# EAGLE board rc-light-controller-ws2812-12f1840-panelized (EAGLE 6.5.0)
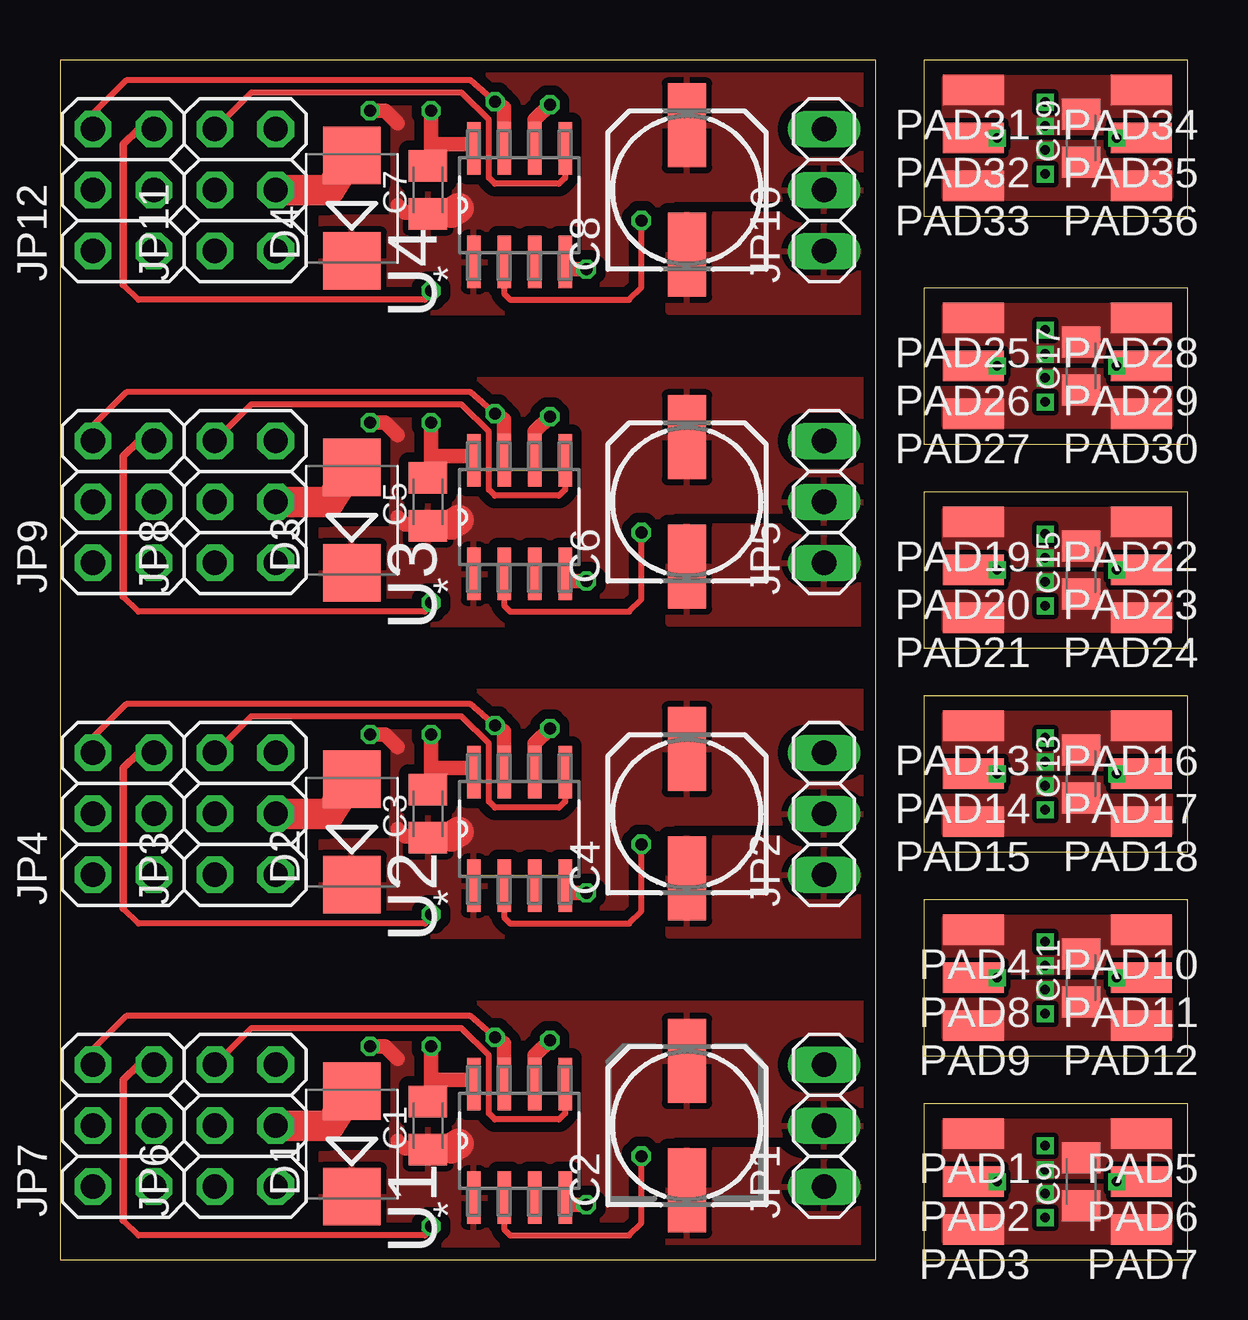
[diagram p0: board, top side]
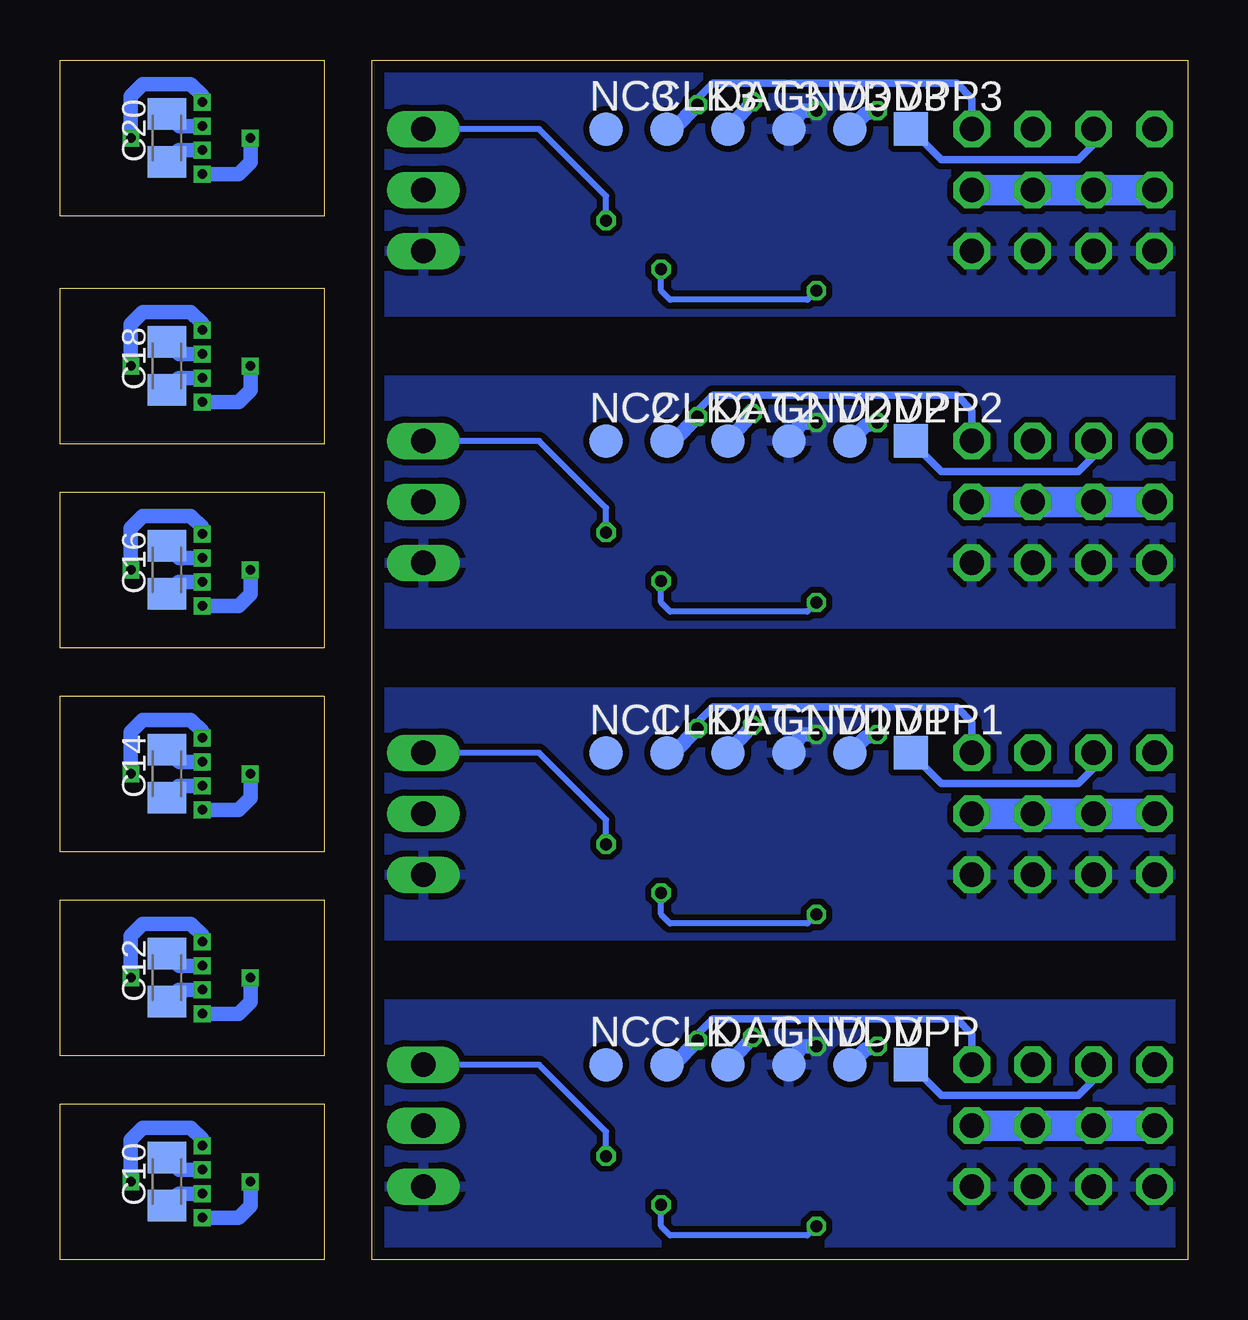
[diagram p1: board, bottom side, seen from below]

Size 47 x 50 mm. Coordinates in mm from the lower left corner, seen from the top.
Outline: 0,0 34,0 34,50 0,50 0,0
Outline: 36,0 47,0 47,6.5 36,6.5 36,0
Outline: 36,8.5 47,8.5 47,15 36,15 36,8.5
Outline: 36,17 47,17 47,23.5 36,23.5 36,17
Outline: 36,25.5 47,25.5 47,32 36,32 36,25.5
Outline: 36,34 47,34 47,40.5 36,40.5 36,34
Outline: 36,43.5 47,43.5 47,50 36,50 36,43.5
Copper layers (1*16): Top 0.035mm / dielectric 1.5mm / Bottom 0.035mm
Design rules "smart-prototyping": minimum track width 7mil, minimum drill 12mil, track to track 7mil, track to pad 7mil, pad to pad 7mil, via to via 7mil, smd to smd 0mil, copper to edge 20mil, drill to drill 10mil, minimum pad ring 10mil, minimum via ring 6mil, stop-mask expansion 2mil, vias tented up to drill 25mil, thermal gap 10mil

## Footprints (pad centres in the part's own frame; a part is rotated, then mirrored left to right if it is on the bottom)
C0805K = smd 1.3 x 1.6: 1 -1,0; 2 1,0
153CLV-0605 = smd 3.5 x 1.6: + 2.7,0; - -2.7,0
TP14R = smd 1.4 x 1.4: TP 0,0
SMB = smd 2.4 x 2.4: A 2.2,0; C -2.2,0
1X03 = drill 1.016 long: 1 -2.54,0; 2 0,0; 3 2.54,0
2X03 = drill 1.016 octagon: 1 -2.54,-1.27; 2 -2.54,1.27; 3 0,-1.27; 4 0,1.27; 5 2.54,-1.27; 6 2.54,1.27
SMD1,27-2,54 = smd 1.27 x 2.54: 1 0,0
SOIC127P600X175-8N = smd 2.184 x 0.559: 1 -2.362,1.905; 2 -2.362,0.635; 3 -2.362,-0.635; 4 -2.362,-1.905; 5 2.362,-1.905; 6 2.362,-0.635; 7 2.362,0.635; 8 2.362,1.905
TP14SQ = smd 1.4 x 1.4: TP 0,0

## Placement (x,y rotation side)
C1  100n  [C0805K]  15.34,5.58 90 top
C2  100u 16V  [153CLV-0605]  26.14,5.58 90 top
C3  100n  [C0805K]  15.34,18.58 90 top
C4  100u 16V  [153CLV-0605]  26.14,18.58 90 top
C5  100n  [C0805K]  15.34,31.58 90 top
C6  100u 16V  [153CLV-0605]  26.14,31.58 90 top
C7  100n  [C0805K]  15.34,44.58 90 top
C8  100u 16V  [153CLV-0605]  26.14,44.58 90 top
C9  100nF  [C0805K]  42.57,3.24 90 top
C10  100nF  [C0805K]  42.54,3.25 90 bottom
C11  100nF  [C0805K]  42.57,11.74 90 top
C12  100nF  [C0805K]  42.54,11.75 90 bottom
C13  100nF  [C0805K]  42.57,20.24 90 top
C14  100nF  [C0805K]  42.54,20.25 90 bottom
C15  100nF  [C0805K]  42.57,28.74 90 top
C16  100nF  [C0805K]  42.54,28.75 90 bottom
C17  100nF  [C0805K]  42.57,37.24 90 top
C18  100nF  [C0805K]  42.54,37.25 90 bottom
C19  100nF  [C0805K]  42.57,46.74 90 top
C20  100nF  [C0805K]  42.54,46.75 90 bottom
CLK  PTR1TP14R  [TP14R]  21.69,8.12 0 bottom
CLK1  PTR1TP14R  [TP14R]  21.69,21.12 0 bottom
CLK2  PTR1TP14R  [TP14R]  21.69,34.12 0 bottom
CLK3  PTR1TP14R  [TP14R]  21.69,47.12 0 bottom
D1  ES2D  [SMB]  12.16,4.82 90 top
D2  ES2D  [SMB]  12.16,17.82 90 top
D3  ES2D  [SMB]  12.16,30.82 90 top
D4  ES2D  [SMB]  12.16,43.82 90 top
DAT  PTR1TP14R  [TP14R]  19.15,8.12 0 bottom
DAT1  PTR1TP14R  [TP14R]  19.15,21.12 0 bottom
DAT2  PTR1TP14R  [TP14R]  19.15,34.12 0 bottom
DAT3  PTR1TP14R  [TP14R]  19.15,47.12 0 bottom
GND  PTR1TP14R  [TP14R]  16.61,8.12 0 bottom
GND1  PTR1TP14R  [TP14R]  16.61,21.12 0 bottom
GND2  PTR1TP14R  [TP14R]  16.61,34.12 0 bottom
GND3  PTR1TP14R  [TP14R]  16.61,47.12 0 bottom
JP1  LED OUT  [1X03]  31.85,5.58 90 top
JP2  LED OUT  [1X03]  31.85,18.58 90 top
JP3  [2X03]  7.72,18.58 90 top
JP4  [2X03]  2.64,18.58 90 top
JP5  LED OUT  [1X03]  31.85,31.58 90 top
JP6  [2X03]  7.72,5.58 90 top
JP7  [2X03]  2.64,5.58 90 top
JP8  [2X03]  7.72,31.58 90 top
JP9  [2X03]  2.64,31.58 90 top
JP10  LED OUT  [1X03]  31.85,44.58 90 top
JP11  [2X03]  7.72,44.58 90 top
JP12  [2X03]  2.64,44.58 90 top
NC  PTR1TP14R  [TP14R]  24.23,8.12 0 bottom
NC1  PTR1TP14R  [TP14R]  24.23,21.12 0 bottom
NC2  PTR1TP14R  [TP14R]  24.23,34.12 0 bottom
NC3  PTR1TP14R  [TP14R]  24.23,47.12 0 bottom
PAD1  [SMD1,27-2,54]  38.07,5.24 90 top
PAD2  WIREPADSMD1,27-254  [SMD1,27-2,54]  38.07,3.24 90 top
PAD3  WIREPADSMD1,27-254  [SMD1,27-2,54]  38.07,1.24 90 top
PAD4  [SMD1,27-2,54]  38.07,13.74 90 top
PAD5  WIREPADSMD1,27-254  [SMD1,27-2,54]  45.07,5.24 90 top
PAD6  WIREPADSMD1,27-254  [SMD1,27-2,54]  45.07,3.24 90 top
PAD7  WIREPADSMD1,27-254  [SMD1,27-2,54]  45.07,1.24 90 top
PAD8  WIREPADSMD1,27-254  [SMD1,27-2,54]  38.07,11.74 90 top
PAD9  WIREPADSMD1,27-254  [SMD1,27-2,54]  38.07,9.74 90 top
PAD10  WIREPADSMD1,27-254  [SMD1,27-2,54]  45.07,13.74 90 top
PAD11  WIREPADSMD1,27-254  [SMD1,27-2,54]  45.07,11.74 90 top
PAD12  WIREPADSMD1,27-254  [SMD1,27-2,54]  45.07,9.74 90 top
PAD13  [SMD1,27-2,54]  38.07,22.24 90 top
PAD14  WIREPADSMD1,27-254  [SMD1,27-2,54]  38.07,20.24 90 top
PAD15  WIREPADSMD1,27-254  [SMD1,27-2,54]  38.07,18.24 90 top
PAD16  WIREPADSMD1,27-254  [SMD1,27-2,54]  45.07,22.24 90 top
PAD17  WIREPADSMD1,27-254  [SMD1,27-2,54]  45.07,20.24 90 top
PAD18  WIREPADSMD1,27-254  [SMD1,27-2,54]  45.07,18.24 90 top
PAD19  [SMD1,27-2,54]  38.07,30.74 90 top
PAD20  WIREPADSMD1,27-254  [SMD1,27-2,54]  38.07,28.74 90 top
PAD21  WIREPADSMD1,27-254  [SMD1,27-2,54]  38.07,26.74 90 top
PAD22  WIREPADSMD1,27-254  [SMD1,27-2,54]  45.07,30.74 90 top
PAD23  WIREPADSMD1,27-254  [SMD1,27-2,54]  45.07,28.74 90 top
PAD24  WIREPADSMD1,27-254  [SMD1,27-2,54]  45.07,26.74 90 top
PAD25  [SMD1,27-2,54]  38.07,39.24 90 top
PAD26  WIREPADSMD1,27-254  [SMD1,27-2,54]  38.07,37.24 90 top
PAD27  WIREPADSMD1,27-254  [SMD1,27-2,54]  38.07,35.24 90 top
PAD28  WIREPADSMD1,27-254  [SMD1,27-2,54]  45.07,39.24 90 top
PAD29  WIREPADSMD1,27-254  [SMD1,27-2,54]  45.07,37.24 90 top
PAD30  WIREPADSMD1,27-254  [SMD1,27-2,54]  45.07,35.24 90 top
PAD31  [SMD1,27-2,54]  38.07,48.74 90 top
PAD32  WIREPADSMD1,27-254  [SMD1,27-2,54]  38.07,46.74 90 top
PAD33  WIREPADSMD1,27-254  [SMD1,27-2,54]  38.07,44.74 90 top
PAD34  WIREPADSMD1,27-254  [SMD1,27-2,54]  45.07,48.74 90 top
PAD35  WIREPADSMD1,27-254  [SMD1,27-2,54]  45.07,46.74 90 top
PAD36  WIREPADSMD1,27-254  [SMD1,27-2,54]  45.07,44.74 90 top
U1  12F1840  [SOIC127P600X175-8N]  19.15,4.95 90 top
U2  12F1840  [SOIC127P600X175-8N]  19.15,17.95 90 top
U3  12F1840  [SOIC127P600X175-8N]  19.15,30.95 90 top
U4  12F1840  [SOIC127P600X175-8N]  19.15,43.95 90 top
VDD  PTR1TP14R  [TP14R]  14.07,8.12 0 bottom
VDD1  PTR1TP14R  [TP14R]  14.07,21.12 0 bottom
VDD2  PTR1TP14R  [TP14R]  14.07,34.12 0 bottom
VDD3  PTR1TP14R  [TP14R]  14.07,47.12 0 bottom
VPP  PTR1TP14SQ  [TP14SQ]  11.53,8.12 0 bottom
VPP1  PTR1TP14SQ  [TP14SQ]  11.53,21.12 0 bottom
VPP2  PTR1TP14SQ  [TP14SQ]  11.53,34.12 0 bottom
VPP3  PTR1TP14SQ  [TP14SQ]  11.53,47.12 0 bottom

## Library data of the parts
C1-C20 = rcl
CLK CLK1-CLK3 DAT DAT1-DAT3 GND GND1-GND3 NC NC1-NC3 VDD VDD1-VDD3 VPP VPP1-VPP3 = testpad
D1-D4 = diode
JP1-JP12 = pinhead
PAD1-PAD36 = wirepad
U1-U4 = PIC12F1840; MPN: PIC12F1840-E/SN; OC_FARNELL: 2045290; OC_NEWARK: 13T4704; PACKAGE: SOIC-8; SUPPLIER: Microchip

## Nets
+: C9.1 C10.1 PAD3.1 PAD7.1
+1: C11.1 C12.1 PAD9.1 PAD12.1
+2: C13.1 C14.1 PAD15.1 PAD18.1
+3: C15.1 C16.1 PAD21.1 PAD24.1
+4: C17.1 C18.1 PAD27.1 PAD30.1
+5: C19.1 C20.1 PAD33.1 PAD36.1
-: C9.2 C10.2 PAD1.1 PAD5.1
-1: C11.2 C12.2 PAD4.1 PAD10.1
-2: C13.2 C14.2 PAD13.1 PAD16.1
-3: C15.2 C16.2 PAD19.1 PAD22.1
-4: C17.2 C18.2 PAD25.1 PAD28.1
-5: C19.2 C20.2 PAD31.1 PAD34.1
CH1: JP4.5 U2.4 VPP1.TP
CH2: JP9.5 U3.4 VPP2.TP
CH3: JP7.5 U1.4 VPP.TP
CH4: JP12.5 U4.4 VPP3.TP
DI: PAD2.1
DI1: PAD8.1
DI2: PAD14.1
DI3: PAD20.1
DI4: PAD26.1
DI5: PAD32.1
DO: PAD6.1
DO1: PAD11.1
DO2: PAD17.1
DO3: PAD23.1
DO4: PAD29.1
DO5: PAD35.1
GND: C1.2 C2.- GND.TP JP1.1 JP6.1 JP6.2 JP7.1 JP7.2 U1.8
GND1: C3.2 C4.- GND1.TP JP2.1 JP3.1 JP3.2 JP4.1 JP4.2 U2.8
GND2: C5.2 C6.- GND2.TP JP5.1 JP8.1 JP8.2 JP9.1 JP9.2 U3.8
GND3: C7.2 C8.- GND3.TP JP10.1 JP11.1 JP11.2 JP12.1 JP12.2 U4.8
N$1: JP2.3 U2.2
N$2: JP5.3 U3.2
N$3: JP10.3 U4.2
N$6: JP1.3 U1.2
OUT/TX: DAT.TP JP7.6 U1.7
OUT/TX1: DAT1.TP JP4.6 U2.7
OUT/TX2: DAT2.TP JP9.6 U3.7
OUT/TX3: DAT3.TP JP12.6 U4.7
ST/RX: CLK.TP JP6.5 U1.6
ST/RX1: CLK1.TP JP3.5 U2.6
ST/RX2: CLK2.TP JP8.5 U3.6
ST/RX3: CLK3.TP JP11.5 U4.6
TH: JP6.6 U1.5
TH1: JP3.6 U2.5
TH2: JP8.6 U3.5
TH3: JP11.6 U4.5
VBAT: D1.A JP6.3 JP6.4 JP7.3 JP7.4
VBAT1: D2.A JP3.3 JP3.4 JP4.3 JP4.4
VBAT2: D3.A JP8.3 JP8.4 JP9.3 JP9.4
VBAT3: D4.A JP11.3 JP11.4 JP12.3 JP12.4
VDD: C1.1 C2.+ D1.C JP1.2 U1.1 VDD.TP
VDD1: C3.1 C4.+ D2.C JP2.2 U2.1 VDD1.TP
VDD2: C5.1 C6.+ D3.C JP5.2 U3.1 VDD2.TP
VDD3: C7.1 C8.+ D4.C JP10.2 U4.1 VDD3.TP

## Tracks (layer width: path | path; a pad name or v marks a point on that pad's centre or on a via)
+  (via drill 0.4)
  Bottom 0.61: C10.1 42.05,2.74 v41.07,2.74
  pour Top (isolate 0.2, no thermals): 36.87,3.04 46.27,3.04 46.27,0.74 36.87,0.74
+1  (via drill 0.4)
  Bottom 0.61: C12.1 42.05,11.24 v41.07,11.24
  pour Top (isolate 0.2, no thermals): 36.87,11.54 46.27,11.54 46.27,9.24 36.87,9.24
+2  (via drill 0.4)
  Bottom 0.61: C14.1 42.05,19.74 v41.07,19.74
  pour Top (isolate 0.2, no thermals): 36.87,20.04 46.27,20.04 46.27,17.74 36.87,17.74
+3  (via drill 0.4)
  Bottom 0.61: C16.1 42.05,28.24 v41.07,28.24
  pour Top (isolate 0.2, no thermals): 36.87,28.54 46.27,28.54 46.27,26.24 36.87,26.24
+4  (via drill 0.4)
  Bottom 0.61: C18.1 42.05,36.74 v41.07,36.74
  pour Top (isolate 0.2, no thermals): 36.87,37.04 46.27,37.04 46.27,34.74 36.87,34.74
+5  (via drill 0.4)
  Bottom 0.61: C20.1 42.05,46.24 v41.07,46.24
  pour Top (isolate 0.2, no thermals): 36.87,46.54 46.27,46.54 46.27,44.24 36.87,44.24
-  (via drill 0.4)
  Bottom 0.61: C10.2 42.04,3.74 v41.07,3.74
  pour Top (isolate 0.2, rank 2, no thermals): 36.87,3.44 46.27,3.44 46.27,5.74 36.87,5.74
-1  (via drill 0.4)
  Bottom 0.61: C12.2 42.04,12.24 v41.07,12.24
  pour Top (isolate 0.2, rank 2, no thermals): 36.87,11.94 46.27,11.94 46.27,14.24 36.87,14.24
-2  (via drill 0.4)
  Bottom 0.61: C14.2 42.04,20.74 v41.07,20.74
  pour Top (isolate 0.2, rank 2, no thermals): 36.87,20.44 46.27,20.44 46.27,22.74 36.87,22.74
-3  (via drill 0.4)
  Bottom 0.61: C16.2 42.04,29.24 v41.07,29.24
  pour Top (isolate 0.2, rank 2, no thermals): 36.87,28.94 46.27,28.94 46.27,31.24 36.87,31.24
-4  (via drill 0.4)
  Bottom 0.61: C18.2 42.04,37.74 v41.07,37.74
  pour Top (isolate 0.2, rank 2, no thermals): 36.87,37.44 46.27,37.44 46.27,39.74 36.87,39.74
-5  (via drill 0.4)
  Bottom 0.61: C20.2 42.04,47.24 v41.07,47.24
  pour Top (isolate 0.2, rank 2, no thermals): 36.87,46.94 46.27,46.94 46.27,49.24 36.87,49.24
CH1  (via drill 0.5)
  Top 0.254: 2.64,14.64 3.27,14.01 15.21,14.01 15.47,14.26 v15.47,14.39
  Top 0.305: 2.64,14.64 2.64,20.48 3.27,21.12 JP4.5
  Top 0.61: v21.94,15.28 21.36,15.28 U2.4
  Bottom 0.254: v15.47,14.39 15.85,14.01 21.56,14.01 21.94,14.39 v21.94,15.28
  Bottom 0.305: JP4.5 3.91,20.48 4.54,19.85 10.26,19.85 VPP1.TP
CH2  (via drill 0.5)
  Top 0.254: 2.64,27.64 3.27,27.01 15.21,27.01 15.47,27.26 v15.47,27.39
  Top 0.305: 2.64,27.64 2.64,33.48 3.27,34.12 JP9.5
  Top 0.61: v21.94,28.28 21.36,28.28 U3.4
  Bottom 0.254: v15.47,27.39 15.85,27.01 21.56,27.01 21.94,27.39 v21.94,28.28
  Bottom 0.305: JP9.5 3.91,33.48 4.54,32.85 10.26,32.85 VPP2.TP
CH3  (via drill 0.5)
  Top 0.254: 2.64,1.64 3.27,1.01 15.21,1.01 15.47,1.26 v15.47,1.39
  Top 0.305: 2.64,1.64 2.64,7.49 3.27,8.12 JP7.5
  Top 0.61: v21.94,2.28 21.36,2.28 U1.4
  Bottom 0.254: v15.47,1.39 15.85,1.01 21.56,1.01 21.94,1.39 v21.94,2.28
  Bottom 0.305: JP7.5 3.91,7.49 4.54,6.85 10.26,6.85 VPP.TP
CH4  (via drill 0.5)
  Top 0.254: 2.64,40.64 3.27,40.01 15.21,40.01 15.47,40.26 v15.47,40.39
  Top 0.305: 2.64,40.64 2.64,46.48 3.27,47.12 JP12.5
  Top 0.61: v21.94,41.28 21.36,41.28 U4.4
  Bottom 0.254: v15.47,40.39 15.85,40.01 21.56,40.01 21.94,40.39 v21.94,41.28
  Bottom 0.305: JP12.5 3.91,46.48 4.54,45.85 10.26,45.85 VPP3.TP
DI  (via drill 0.4)
  Top 0.406: v39.07,3.24 PAD2.1
  Bottom 0.61: v41.07,1.74 39.55,1.74 39.04,2.25 39.04,3.22 v39.07,3.24
DI1  (via drill 0.4)
  Top 0.406: v39.07,11.74 PAD8.1
  Bottom 0.61: v41.07,10.24 39.55,10.24 39.04,10.75 39.04,11.72 v39.07,11.74
DI2  (via drill 0.4)
  Top 0.406: v39.07,20.24 PAD14.1
  Bottom 0.61: v41.07,18.74 39.55,18.74 39.04,19.25 39.04,20.22 v39.07,20.24
DI3  (via drill 0.4)
  Top 0.406: v39.07,28.74 PAD20.1
  Bottom 0.61: v41.07,27.24 39.55,27.24 39.04,27.75 39.04,28.72 v39.07,28.74
DI4  (via drill 0.4)
  Top 0.406: v39.07,37.24 PAD26.1
  Bottom 0.61: v41.07,35.74 39.55,35.74 39.04,36.25 39.04,37.22 v39.07,37.24
DI5  (via drill 0.4)
  Top 0.406: v39.07,46.74 PAD32.1
  Bottom 0.61: v41.07,45.24 39.55,45.24 39.04,45.75 39.04,46.72 v39.07,46.74
DO  (via drill 0.4)
  Top 0.406: 44.54,3.24 PAD6.1
  Top 0.61: v44.04,3.25 v44.04,3.24 44.54,3.24
  Bottom 0.61: v41.07,4.74 41.07,5.02 41.54,5.5 43.54,5.5 44.04,5 v44.04,3.24
DO1  (via drill 0.4)
  Top 0.406: 44.54,11.74 PAD11.1
  Top 0.61: v44.04,11.75 v44.04,11.74 44.54,11.74
  Bottom 0.61: v41.07,13.24 41.07,13.52 41.54,14 43.54,14 44.04,13.5 v44.04,11.74
DO2  (via drill 0.4)
  Top 0.406: 44.54,20.24 PAD17.1
  Top 0.61: v44.04,20.25 v44.04,20.24 44.54,20.24
  Bottom 0.61: v41.07,21.74 41.07,22.02 41.54,22.5 43.54,22.5 44.04,22 v44.04,20.24
DO3  (via drill 0.4)
  Top 0.406: 44.54,28.74 PAD23.1
  Top 0.61: v44.04,28.75 v44.04,28.74 44.54,28.74
  Bottom 0.61: v41.07,30.24 41.07,30.52 41.54,31 43.54,31 44.04,30.5 v44.04,28.74
DO4  (via drill 0.4)
  Top 0.406: 44.54,37.24 PAD29.1
  Top 0.61: v44.04,37.25 v44.04,37.24 44.54,37.24
  Bottom 0.61: v41.07,38.74 41.07,39.02 41.54,39.5 43.54,39.5 44.04,39 v44.04,37.24
DO5  (via drill 0.4)
  Top 0.406: 44.54,46.74 PAD35.1
  Top 0.61: v44.04,46.75 v44.04,46.74 44.54,46.74
  Bottom 0.61: v41.07,48.24 41.07,48.52 41.54,49 43.54,49 44.04,48.5 v44.04,46.74
GND  (via drill 0.5)
  Top 0.61: v15.47,8.88 15.47,7.49 | 15.47,7.49 15.47,6.58 C1.2 | U1.8 17.25,7.49 15.47,7.49
  Bottom 0.61: GND.TP 16.1,8.88 v15.47,8.88
  pour Bottom (isolate 0.254): 0.1,10.66 0.1,0.5 33.76,0.5 33.76,10.66
  pour Top (isolate 0.61): 33.76,0.5 25.37,0.5 25.37,4.56 33.76,4.56
GND1  (via drill 0.5)
  Top 0.61: v15.47,21.88 15.47,20.48 | 15.47,20.48 15.47,19.58 C3.2 | U2.8 17.25,20.48 15.47,20.48
  Bottom 0.61: GND1.TP 16.1,21.88 v15.47,21.88
  pour Bottom (isolate 0.254): 0.1,23.66 0.1,13.5 33.76,13.5 33.76,23.66
  pour Top (isolate 0.61): 33.76,13.5 25.37,13.5 25.37,17.56 33.76,17.56
GND2  (via drill 0.5)
  Top 0.61: v15.47,34.88 15.47,33.48 | 15.47,33.48 15.47,32.58 C5.2 | U3.8 17.25,33.48 15.47,33.48
  Bottom 0.61: GND2.TP 16.1,34.88 v15.47,34.88
  pour Bottom (isolate 0.254): 0.1,36.66 0.1,26.5 33.76,26.5 33.76,36.66
  pour Top (isolate 0.61): 33.76,26.5 25.37,26.5 25.37,30.56 33.76,30.56
GND3  (via drill 0.5)
  Top 0.61: v15.47,47.88 15.47,46.48 | 15.47,46.48 15.47,45.58 C7.2 | U4.8 17.25,46.48 15.47,46.48
  Bottom 0.61: GND3.TP 16.1,47.88 v15.47,47.88
  pour Bottom (isolate 0.254): 0.1,49.66 0.1,39.5 33.76,39.5 33.76,49.66
  pour Top (isolate 0.61): 33.76,39.5 25.37,39.5 25.37,43.56 33.76,43.56
N$1  (via drill 0.5)
  Top 0.254: U2.2 18.52,14.26 18.77,14.01 23.72,14.01 24.23,14.52 v24.23,17.31
  Bottom 0.254: v24.23,17.31 24.23,18.33 27.02,21.12 JP2.3
N$2  (via drill 0.5)
  Top 0.254: U3.2 18.52,27.26 18.77,27.01 23.72,27.01 24.23,27.52 v24.23,30.31
  Bottom 0.254: v24.23,30.31 24.23,31.33 27.02,34.12 JP5.3
N$3  (via drill 0.5)
  Top 0.254: U4.2 18.52,40.26 18.77,40.01 23.72,40.01 24.23,40.52 v24.23,43.31
  Bottom 0.254: v24.23,43.31 24.23,44.33 27.02,47.12 JP10.3
N$6  (via drill 0.5)
  Top 0.254: U1.2 18.52,1.26 18.77,1.01 23.72,1.01 24.23,1.52 v24.23,4.31
  Bottom 0.254: v24.23,4.31 24.23,5.33 27.02,8.12 JP1.3
OUT/TX  (via drill 0.5)
  Top 0.254: JP7.6 1.37,8.76 2.77,10.15 17.12,10.15 v18.13,9.26
  Top 0.61: U1.7 18.52,9.01 v18.13,9.26
  Bottom 0.61: DAT.TP v18.13,9.26
OUT/TX1  (via drill 0.5)
  Top 0.254: JP4.6 1.37,21.75 2.77,23.15 17.12,23.15 v18.13,22.26
  Top 0.61: U2.7 18.52,22.01 v18.13,22.26
  Bottom 0.61: DAT1.TP v18.13,22.26
OUT/TX2  (via drill 0.5)
  Top 0.254: JP9.6 1.37,34.76 2.77,36.15 17.12,36.15 v18.13,35.26
  Top 0.61: U3.7 18.52,35.01 v18.13,35.26
  Bottom 0.61: DAT2.TP v18.13,35.26
OUT/TX3  (via drill 0.5)
  Top 0.254: JP12.6 1.37,47.76 2.77,49.15 17.12,49.15 v18.13,48.26
  Top 0.61: U4.7 18.52,48.01 v18.13,48.26
  Bottom 0.61: DAT3.TP v18.13,48.26
ST/RX  (via drill 0.5)
  Top 0.61: U1.6 19.79,8.5 v20.42,9.14
  Bottom 0.305: JP6.5 8.99,9.39 9.62,10.03 19.79,10.03 20.42,9.39 v20.42,9.14
  Bottom 0.61: CLK.TP 21.44,8.12 v20.42,9.14
ST/RX1  (via drill 0.5)
  Top 0.61: U2.6 19.79,21.5 v20.42,22.14
  Bottom 0.305: JP3.5 8.99,22.39 9.62,23.02 19.79,23.02 20.42,22.39 v20.42,22.14
  Bottom 0.61: CLK1.TP 21.44,21.12 v20.42,22.14
ST/RX2  (via drill 0.5)
  Top 0.61: U3.6 19.79,34.5 v20.42,35.14
  Bottom 0.305: JP8.5 8.99,35.39 9.62,36.02 19.79,36.02 20.42,35.39 v20.42,35.14
  Bottom 0.61: CLK2.TP 21.44,34.12 v20.42,35.14
ST/RX3  (via drill 0.5)
  Top 0.61: U4.6 19.79,47.5 v20.42,48.14
  Bottom 0.305: JP11.5 8.99,48.39 9.62,49.02 19.79,49.02 20.42,48.39 v20.42,48.14
  Bottom 0.61: CLK3.TP 21.44,47.12 v20.42,48.14
TH
  Top 0.254: U1.5 21.05,6.09 20.8,5.83 18.13,5.83 17.88,6.09 17.88,8.5 16.74,9.64 7.97,9.64 JP6.6
TH1
  Top 0.254: U2.5 21.05,19.09 20.8,18.83 18.13,18.83 17.88,19.09 17.88,21.5 16.74,22.64 7.97,22.64 JP3.6
TH2
  Top 0.254: U3.5 21.05,32.09 20.8,31.83 18.13,31.83 17.88,32.09 17.88,34.5 16.74,35.64 7.97,35.64 JP8.6
TH3
  Top 0.254: U4.5 21.05,45.09 20.8,44.83 18.13,44.83 17.88,45.09 17.88,47.5 16.74,48.64 7.97,48.64 JP11.6
VBAT
  Top 1.27: JP6.3 11.23,5.58 D1.A
  Bottom 1.27: JP7.4 JP7.3 JP6.4 JP6.3
VBAT1
  Top 1.27: JP3.3 11.23,18.58 D2.A
  Bottom 1.27: JP4.4 JP4.3 JP3.4 JP3.3
VBAT2
  Top 1.27: JP8.3 11.23,31.58 D3.A
  Bottom 1.27: JP9.4 JP9.3 JP8.4 JP8.3
VBAT3
  Top 1.27: JP11.3 11.23,44.58 D4.A
  Bottom 1.27: JP12.4 JP12.3 JP11.4 JP11.3
VDD  (via drill 0.5)
  Top 0.61: 16.29,4.63 14.39,4.63 14.07,4.95 | 14.07,8.37 13.56,8.88 v12.93,8.88
  Top 1.27: 16.61,4.82 16.29,4.63
  Bottom 0.61: v12.93,8.88 13.44,8.76 VDD.TP
  pour Top (isolate 0.406, rank 2): 10.89,0.5 33.76,0.5 33.76,10.66 13.82,10.66 13.82,4.44 10.89,4.44
VDD1  (via drill 0.5)
  Top 0.61: 16.29,17.63 14.39,17.63 14.07,17.95 | 14.07,21.37 13.56,21.88 v12.93,21.88
  Top 1.27: 16.61,17.82 16.29,17.63
  Bottom 0.61: v12.93,21.88 13.44,21.75 VDD1.TP
  pour Top (isolate 0.406, rank 2): 10.89,13.5 33.76,13.5 33.76,23.66 13.82,23.66 13.82,17.44 10.89,17.44
VDD2  (via drill 0.5)
  Top 0.61: 16.29,30.63 14.39,30.63 14.07,30.95 | 14.07,34.37 13.56,34.88 v12.93,34.88
  Top 1.27: 16.61,30.82 16.29,30.63
  Bottom 0.61: v12.93,34.88 13.44,34.76 VDD2.TP
  pour Top (isolate 0.406, rank 2): 10.89,26.5 33.76,26.5 33.76,36.66 13.82,36.66 13.82,30.44 10.89,30.44
VDD3  (via drill 0.5)
  Top 0.61: 16.29,43.63 14.39,43.63 14.07,43.95 | 14.07,47.37 13.56,47.88 v12.93,47.88
  Top 1.27: 16.61,43.82 16.29,43.63
  Bottom 0.61: v12.93,47.88 13.44,47.76 VDD3.TP
  pour Top (isolate 0.406, rank 2): 10.89,39.5 33.76,39.5 33.76,49.66 13.82,49.66 13.82,43.44 10.89,43.44

## Text on the board
tValues: Servo / Tx | CH3 | TH | ST/Rx | + | Data | + | * | - | GND | GND | Servo / Tx | CH3 | TH | ST/Rx | + | Data | + | * | - | GND | GND | Servo / Tx | CH3 | TH | ST/Rx | + | Data | + | * | - | GND | GND | Servo / Tx | CH3 | TH | ST/Rx | + | Data | + | * | - | GND | GND
bValues: LED OUT | Servo / Tx | CH3 | TH | ST/Rx | Vpp | Data | + | WS2812 RC Light controller | Rev 1 | + | LANE Boys RC | GND | GND
tDocu: LONG | - | DI | DO | * | +
bDocu: long | *short
_tNames: C2 | C1 | D1 | JP2 | JP1 | U1
_bNames: VPP | VDD | GND | DAT | CLK | NC